# Altium PCB PCB1.PcbDoc
Units mil, origin at the board's own origin, x right, y up, seen from the top; angles counter-clockwise.
Board outline 6000 x 4000 mil, 2 copper layers (Top Layer, Bottom Layer); 12 components, 8 nets, 31 pads, 0 vias.
Unrouted connection lines stored in the file: 23.
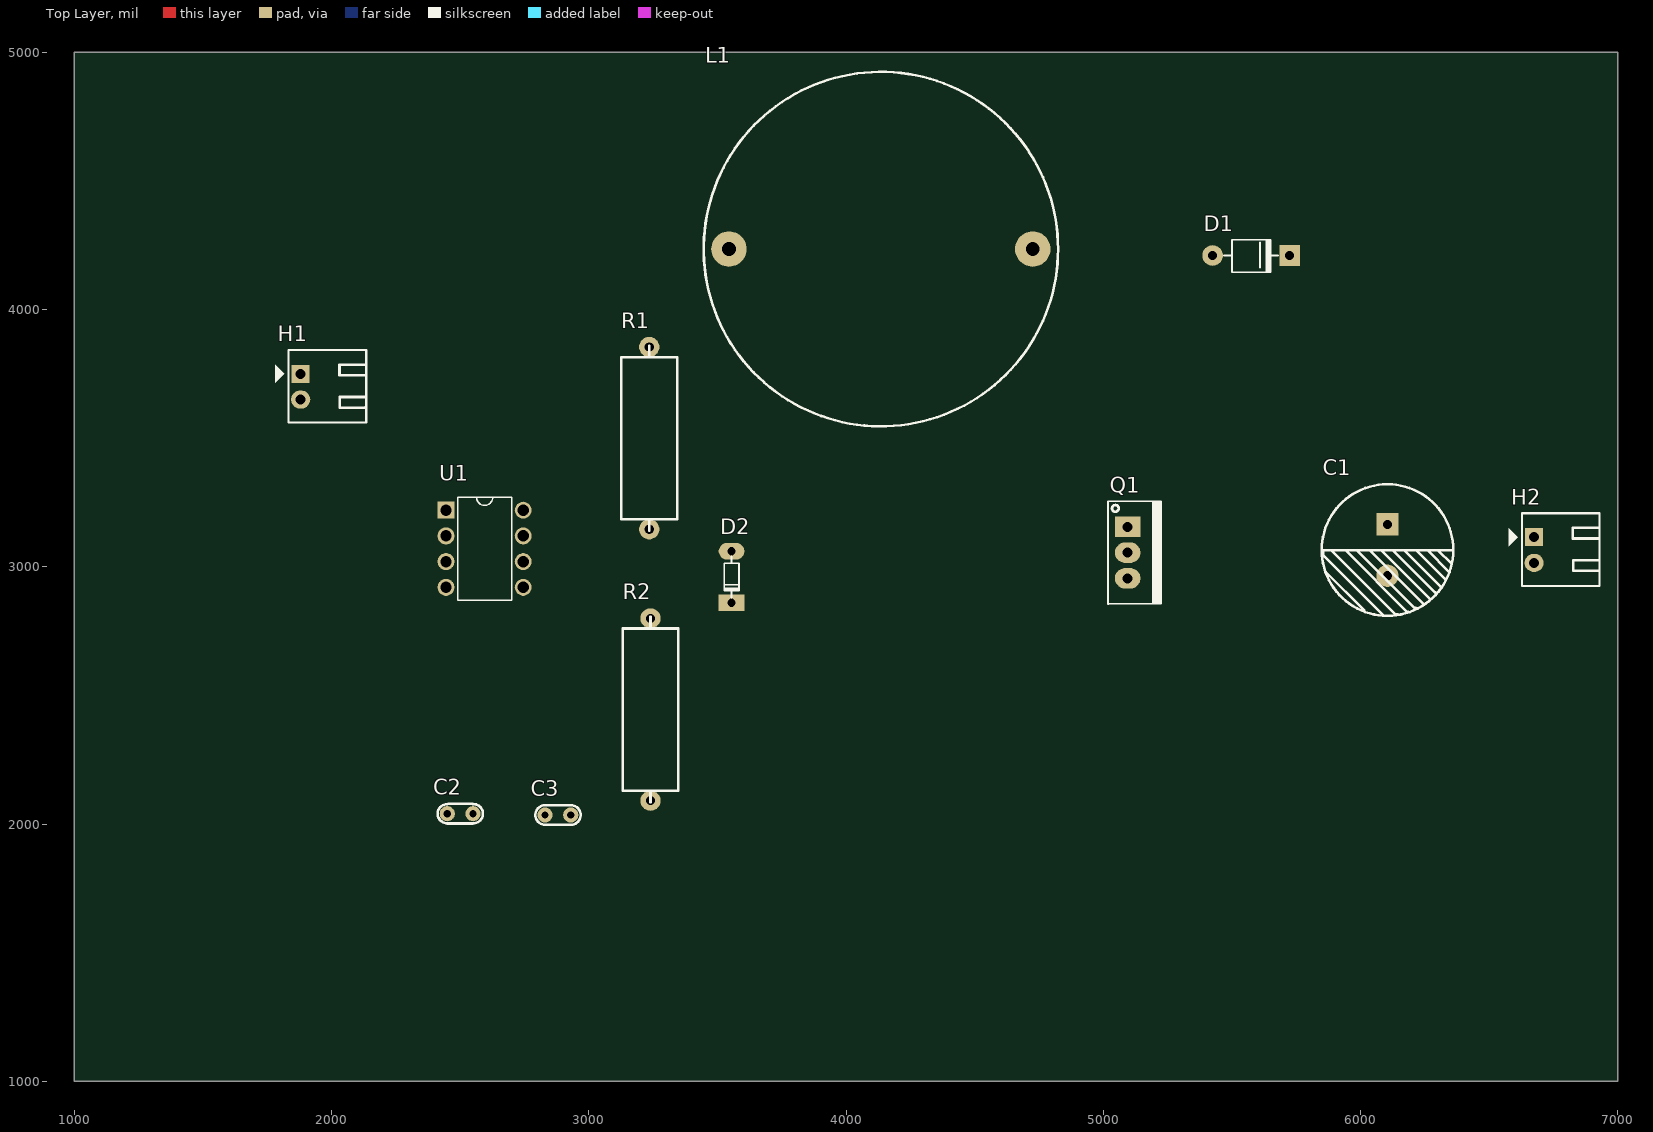
[diagram p0: Top Layer view]
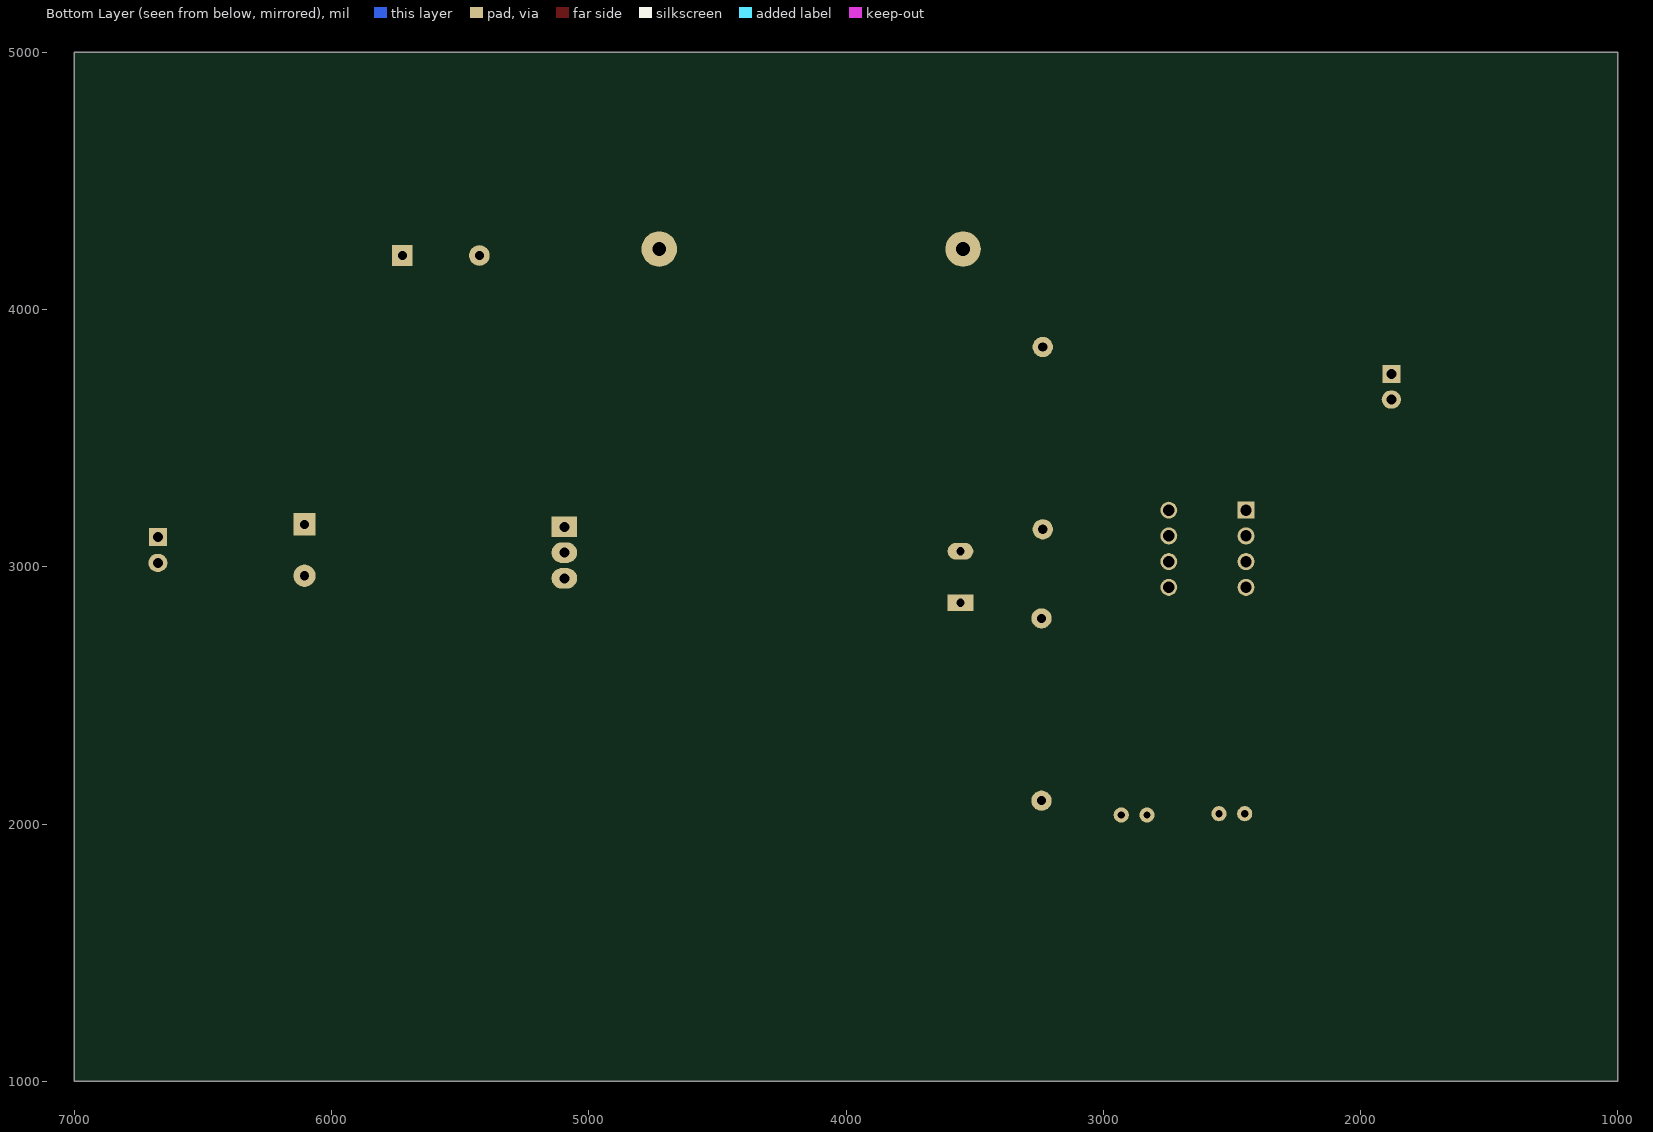
[diagram p1: Bottom Layer view, seen from below]

## Layer stack, top to bottom
Top Solder: solder mask 0.4, Solder Resist, Dk 3.5
Top Layer: signal copper 1.4
Dielectric 1: dielectric 12.6, FR-4, Dk 4.8
Bottom Layer: signal copper 1.4
Bottom Solder: solder mask 0.4, Solder Resist, Dk 3.5

## Board outline
1000,1000 7000,1000 7000,5000 1000,5000

## Design rules (kind name [scope] priority, off if disabled: settings)
Clearance [All] p1: gap=10 ignorepadtopadclearanceinfootprint=FALSE except(0: Arc-Hole Track-Hole SMDPad-Hole THPad-Hole Via-Hole Fill-Hole Poly-Hole Region-Hole Text-Hole)
PolygonConnect [All] p1: connectstyle=Relief reliefconductorwidth=10 reliefentries=4 polygonreliefangle="90 Angle" airgapwidth=10
RoomDefinition Sheet1 [InComponentClass('Sheet1')] p1: confinementstyle=ConfineIn formatcopy=TRUE lockcomponents=FALSE outline 7045,1060 11790,1060 11790,2560 7045,2560
RoutingVias [All] p1: holewidth=28 width=50 viastyle="Through Hole" minholewidth=28 minwidth=50 maxholewidth=28 maxwidth=50
SolderMaskExpansion [All] p1: expansion=4 istentingtop=FALSE
Width [All] p1: maxlimit=10 minlimit=10 preferedwidth=10
30 further rules are at their usual default settings.

## Components (designator, comment, footprint, x,y, rotation, side; value= is the part's Value field where it differs from the comment)
C1 "2200uF" "tu hoa 13mm" 6105,3065 r270 top
C2 "103" "tu gom" 2500,2040 r180 top
C3 "103" "tu gom" 2880,2035 r180 top
D1 "100v" "DIODE 1A" 5375,4210 r180 top
D2 "100v" "DIODE 0.5A" 3555,2960 r90 top
H1 "Header 2P 2.54 Duc Cong" "Header 2P DC 2.54" 1880,3750 r0 top
H2 "Header 2P 2.54 Duc Cong" "Header 2P DC 2.54" 6675,3115 r0 top
L1 "330uH" IND_30.1MM_TH 3545,4235 r0 top
Q1 "IRFZ44" TO220 5095,3155 r270 top
R1 "1k" "tro vach 1w" 3235,3500 r90 top
R2 "15k" "tro vach 1w" 3240,2445 r90 top
U1 "NE555" PDIP-8_100_393_66X66_TH 2445,3220 r0 top

## Footprints (in the part's own frame and the unit in brackets; to place one, negate y for a bottom-side part, rotate by r counter-clockwise, add the part's x,y. Pads: shape width x height; smd on the part's side, far side on the other; paste and mask are expansions set on the pad)
"DIODE 0.5A" [mil] "Diode muoi, xung"
  oval 65x100 hole 32: 1(100,0)
  rect 65x100 hole 32: 2(-100,0)
  silkscreen extent -80,-30 80,28, body extent -108,-33 108,32, height 61
"DIODE 1A" [mil] "Diode 1A"
  round 80 hole 35: 1(-50,0)
  rect 80x80 hole 35: 2(-350,0)
  silkscreen extent -305,-61 -95,65, body extent -366,-61 -34,65, height 122
"Header 2P DC 2.54" [mil]
  rect 70x70 hole 39.37 unplated: 1(0,0)
  oval 75x70 hole 39.37 unplated: 2(0,-100)
  silkscreen extent -100,-190 255,93, body extent -50,-190 250,90, height 237
IND_30.1MM_TH [mm]
  round 3.5 hole 1.35: 1(0,0) 2(30,0)
  silkscreen extent -2.5,-17.5 32.5,17.5, body extent 3.06,-12.14 27.42,12.39, height 14.28
PDIP-8_100_393_66X66_TH [mil] "DIP-8 Package"
  rect 66x66 hole 44: 1(0,0)
  round 66 hole 44: 2(0,-100) 3(0,-200) 4(0,-300) 5(300,-300) 6(300,-200) 7(300,-100) 8(300,0)
  silkscreen extent 45,-350 256,50, body extent -12,-366 298,84, height 165
TO220 [mil] "TO-220"
  rect 80x100 hole 39: 1(0,0)
  oval 80x100 hole 39: 2(100,0) 3(200,0)
  silkscreen extent -100,-76 300,130, body extent -95,-80 295,97, height 323
"tro vach 1w" [mm]
  round 2 hole 0.9: 1(-9,0) 2(9,0)
  silkscreen extent -9.14,-2.75 9.14,2.75, body extent -9.29,-3 9.29,3, height 6.5
"tu gom" [mm] "Tu gom mini"
  round 1.5 hole 0.7: 1(-1.27,0) 2(1.27,0)
  silkscreen extent -2.25,-0.97 2.22,0.97, body extent -2.92,-0.85 2.92,0.85, height 6.12
"tu hoa 13mm" [mm]
  rect 2.2x2.2 hole 0.9: 1(-2.54,0)
  round 2.2 hole 0.9: 2(2.54,0)
  silkscreen extent -6.5,-6.5 6.5,6.5, body extent -6.25,-6.25 6.26,6.25, height 23.02

## Part data
C1: library part "Tu Hoa 2200uF 25V 13x20", "Cắm", Chung_Loai=Cắm, Don_Vi=Con, Ma_Hang=MH002203, So_Chan=2, Ten_Linh_Kien="Tụ Hóa 2200uF 25V 13x20MM"
C2 C3: library part "Tu gom 103 50V", "Cắm", Chung_Loai=Cắm, Don_Vi=Con, Ma_Hang=MH000936, So_Chan=2, Ten_Linh_Kien="Tụ gốm 103 10nF 50V"
D1: library part "Diode 1N4007", "Cắm", Chung_Loai=Cắm, Don_Vi=Con, Ma_Hang=MH001063, Ten_Linh_Kien="Diode 1N4007 1A (DIP)"
D2: library part "Diode 1N4148", "Cắm", Chung_Loai=Cắm, Don_Vi=Con, Ma_Hang=MH001065, Ten_Linh_Kien="Diode 1N4148 DO35 450mA 100V ( 1N4148 DIP)"
H1 H2: "Cắm", Chung_Loai=Cắm, Don_Vi=Con, Ma_Hang=MH002852, Ten_Linh_Kien="Header 2P XH2.54-2P Đực Cong"
L1: library part IND_330uH-10A-TH, "330uH-10A-CHINESE INDUCTOR", Alternate Part Number-1=NA, Case/Package=TH, Manufacturer=NA, Manufacturer Part Number=NA, Supplier Part Number-1=NA, Supplier-1="SP ROAD"
Q1: library part "IRFZ44 DIP", "N-Channel Power MOSFET"
R1: library part "Tro Vach 1W 5% 1k", "Cắm", Chung_Loai=Cắm, Don_Vi=Con, Ma_Hang=MH006397, So_Chan=2, Ten_Linh_Kien="Trở 5% 1w 1k"
R2: library part "Tro Vach 1W 5% 15k", "Cắm", Chung_Loai=Cắm, Don_Vi=Con, Ma_Hang=MH006396, So_Chan=2, Ten_Linh_Kien="Trở 5% 1w 15k"
U1: library part IC_LMC555CN/NOPB, "555 Type, Timer/Oscillator (Single) IC 3MHz 8-PDIP", Alternate Part Number-1=NE555N, Case/Package=8-PDIP, Manufacturer="Texas Instruments", Manufacturer Part Number=LMC555CN/NOPB, Supplier Part Number-1=LMC555CN/NOPB-ND, Supplier-1=Digikey

## Nets (pads, with @x,y where several pads share a name; then routed paths per layer and width w, separated by ;. In a path a pad name is that pad's centre, name@x,y a point inside that pad or via, vN(x,y) a via of type N, cw(c..) or ccw(c..) an arc to the next point about the centre after c; other vN are vias at no path point)
GND: C1.2 C2.2 C3.2 H1.1 H2.2 Q1.3 U1.1
NetC1_1: C1.1 D1.2 H2.1
NetC2_1: C2.1 U1.5
NetC3_1: C3.1 D2.2 R2.2 U1.2 U1.6
NetD1_1: D1.1 L1.2 Q1.2
NetD2_1: D2.1 R1.1 R2.1 U1.7
NetH1_2: H1.2 L1.1 R1.2 U1.4 U1.8
NetQ1_1: Q1.1 U1.3